# Altium PCB Transceiver.PcbDoc
Units mm, origin at the board's own origin, x right, y up, seen from the top; angles counter-clockwise.
Board outline 22 x 22.73 mm, 2 copper layers (Top Layer, Bottom Layer); 6 components, 7 nets, 20 pads, 3 vias.
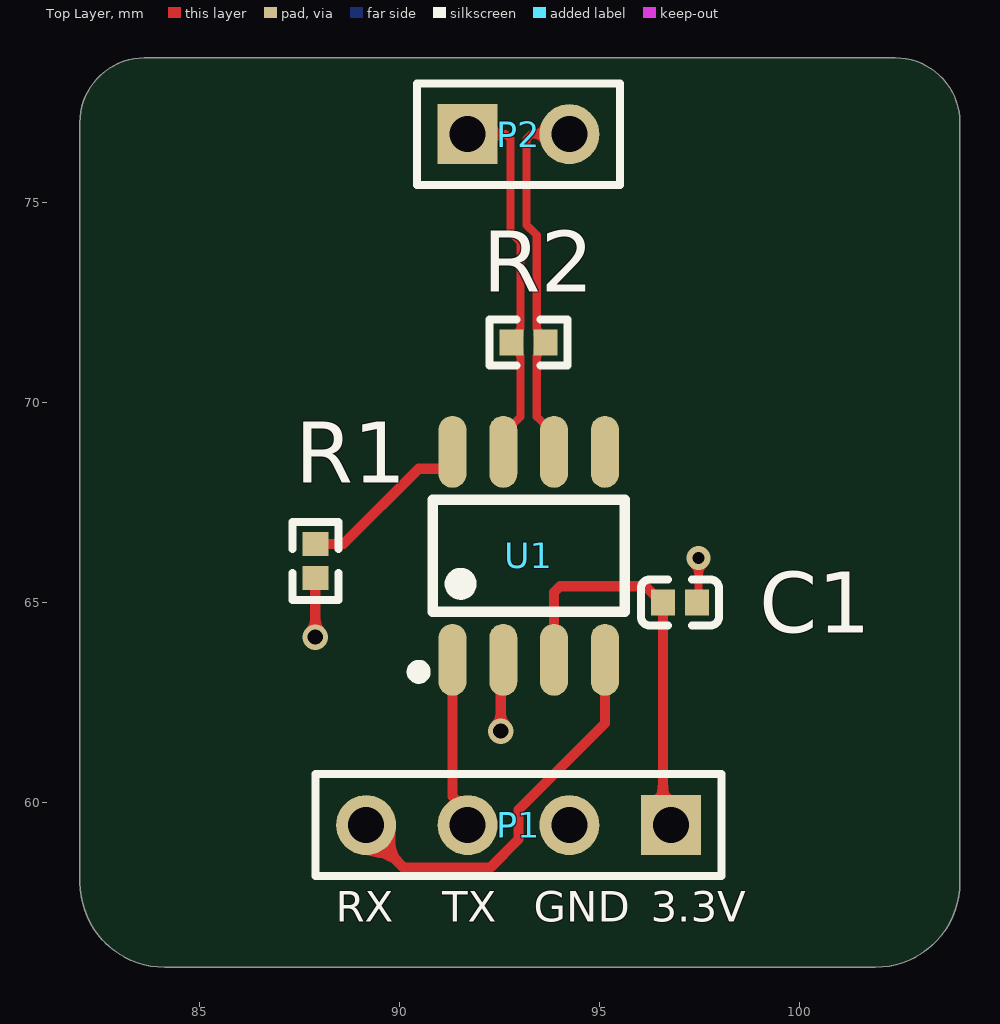
[diagram p0: Top Layer view]
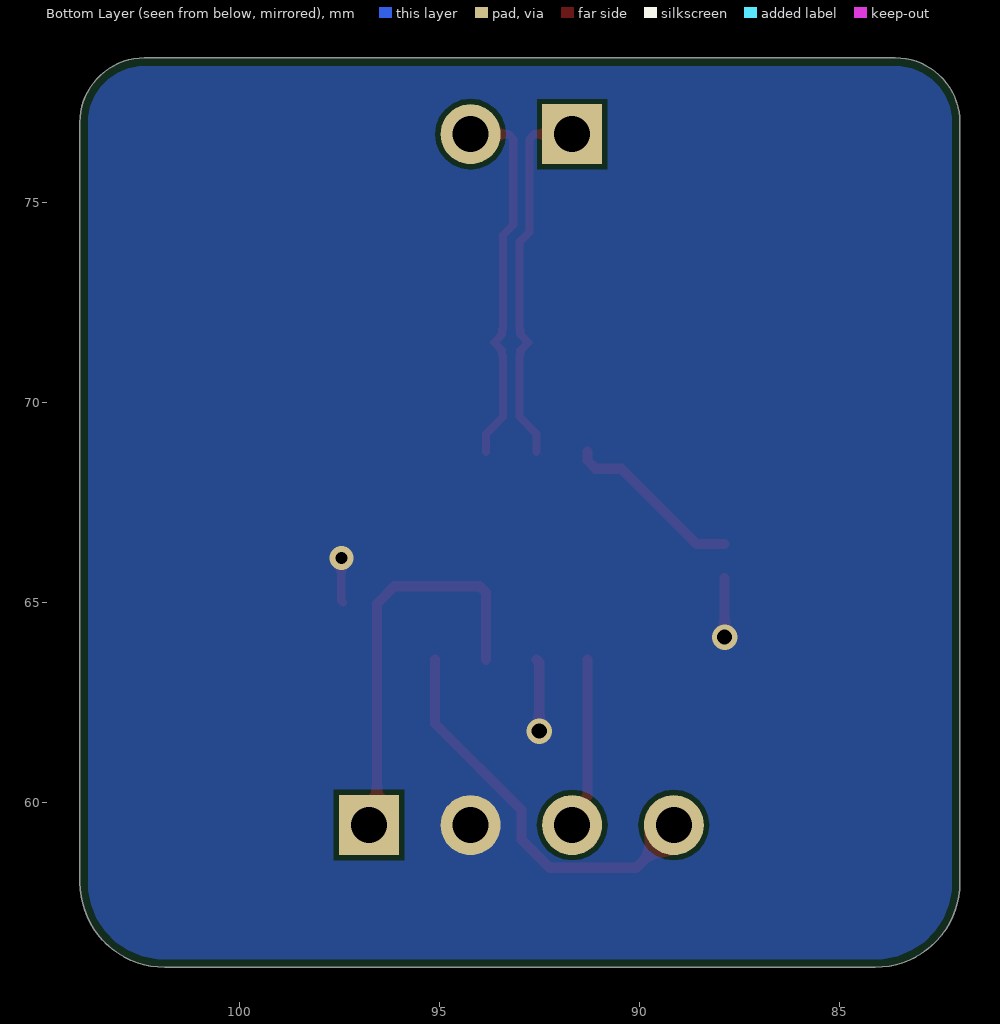
[diagram p1: Bottom Layer view, seen from below]
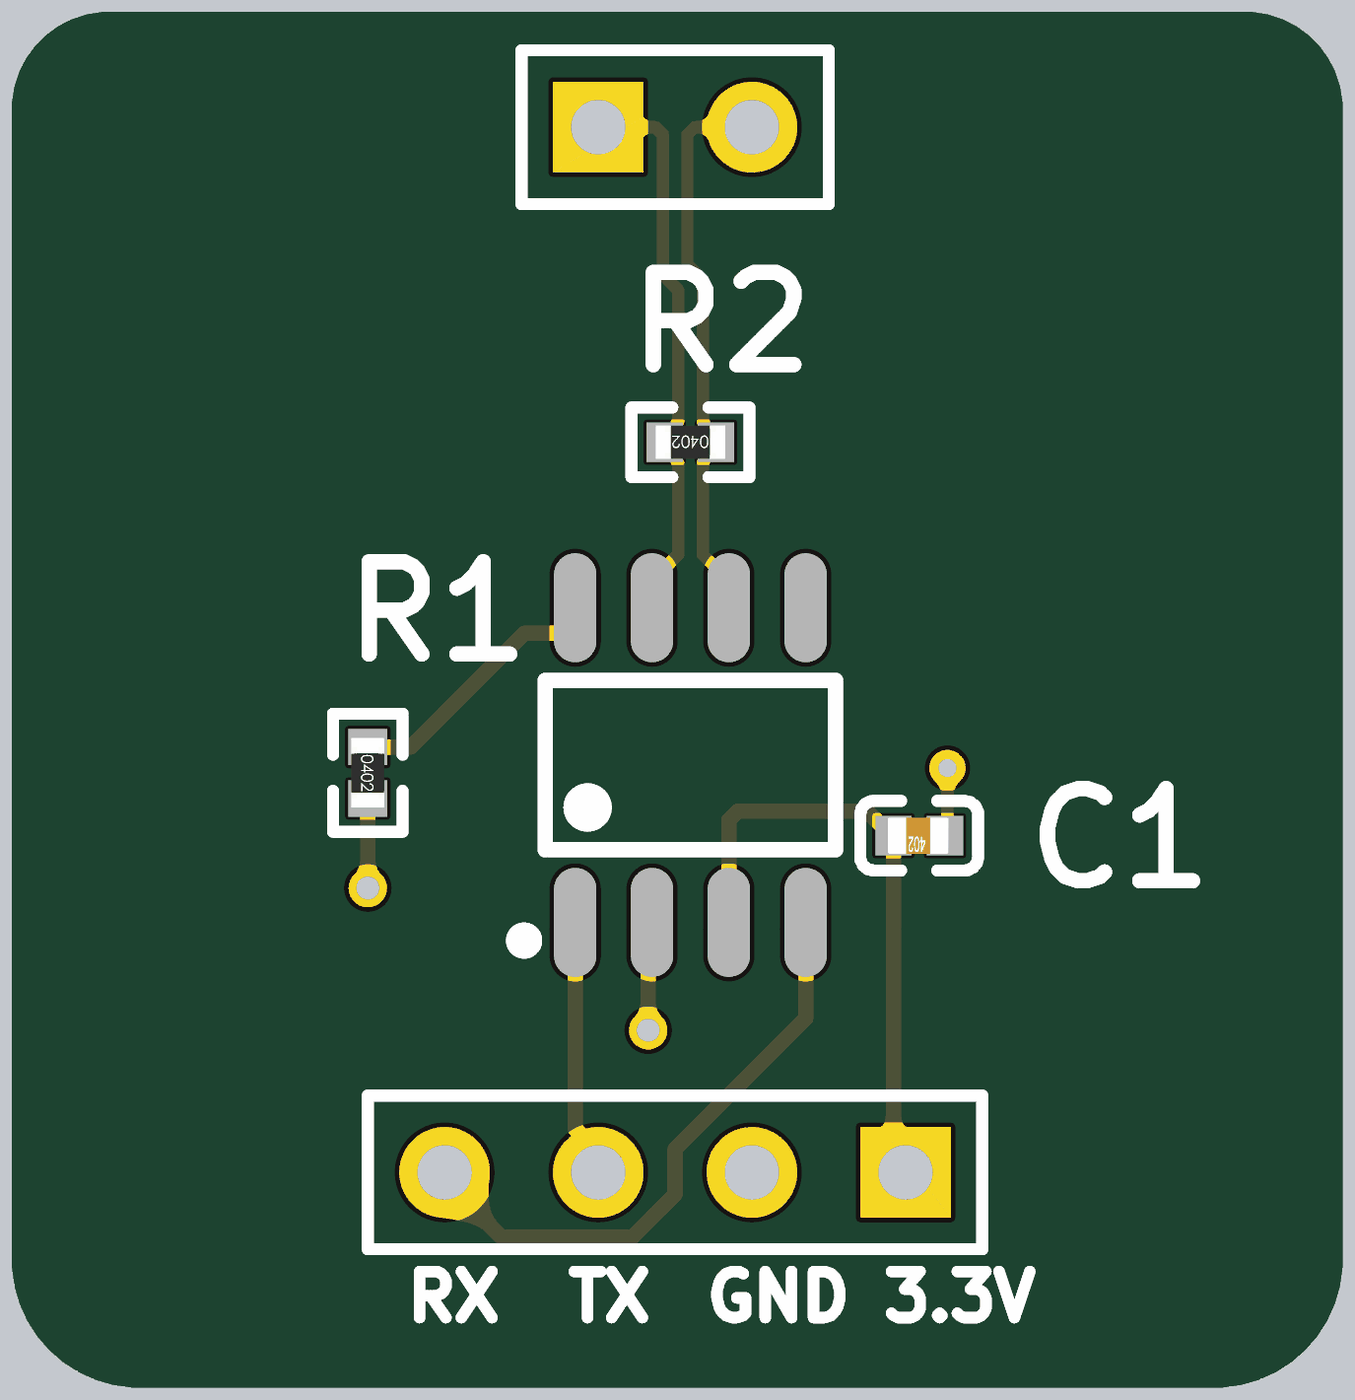
[diagram p2: 3D render of the assembled board from above, using the file's embedded part models]

## Layer stack, top to bottom
Top Solder: solder mask 0.0102, Solder Resist, Dk 3.5
Top Layer: signal copper 0.0356
Dielectric 1: dielectric 0.32, FR-4, Dk 4.8
Bottom Layer: signal copper 0.0356
Bottom Solder: solder mask 0.0102, Solder Resist, Dk 3.5

## Board outline
84.12,55.88 101.88,55.88 ccw(c101.88,58) 104,58 104,77 ccw(c102.387,77) 102.387,78.613 83.613,78.613 ccw(c83.613,77) 82,77 82,58 ccw(c84.12,58)

## Design rules (kind name [scope] priority, off if disabled: settings)
BoardOutlineClearance [All] p1: gap=0.2 ignorepadtopadclearanceinfootprint=FALSE
Clearance [All] p1: gap=0.127 ignorepadtopadclearanceinfootprint=FALSE except(0.25: Arc-Hole Track-Hole SMDPad-Hole THPad-Hole Via-Hole Fill-Hole Poly-Hole Region-Hole Text-Hole)
ComponentClearance [All] p1: gap=0.127 collisioncheckmode=3 verticalgap=0.127 showdistances=TRUE
DiffPairsRouting [All] p1: maxlimit=0.254 minlimit=0.127 mostfreqgap=0.203 toplayer_minwidth=0.127 toplayer_maxwidth=25.4 toplayer_prefwidth=0.127 bottomlayer_minwidth=0.127 bottomlayer_maxwidth=25.4 bottomlayer_prefwidth=0.127 maxuncoupledlength=12.7
Height [All] p1: minheight=0 maxheight=1816.048 prefheight=12.7
HoleSize [All] p1: absolutevalues=TRUE maxlimit=6.3 minlimit=0.3 maxpercent=80.000 minpercent=20.000
HoleToHoleClearance [All] p1: gap=0.25 allowstackedmicrovias=FALSE
MinimumAnnularRing [All] p1: minimumring=0.076
MinimumSolderMaskSliver [All] p1: minsoldermaskwidth=0
PlaneClearance [All] p1: clearance=0.127
PlaneConnect PlaneConnectPowerPads [InPadClass('PowerPads')] p1: planeconnectstyle=Direct reliefexpansion=0.508 reliefentries=4 reliefconductorwidth=0.254 reliefairgap=0.254
PlaneConnect [All] p2: pad.planeconnectstyle=Relief pad.reliefexpansion=0.3 pad.reliefentries=4 pad.reliefconductorwidth=0.127 pad.reliefairgap=0.127 via.planeconnectstyle=Direct via.reliefexpansion=0.3 via.reliefentries=4 via.reliefconductorwidth=0.127 via.reliefairgap=0.127
PolygonConnect [All] p1: thpad.connectstyle=Direct thpad.reliefconductorwidth=0.127 thpad.reliefentries=4 thpad.polygonreliefangle="90 Angle" thpad.airgapwidth=0.127 smdpad.connectstyle=Relief smdpad.reliefconductorwidth=0.127 smdpad.reliefentries=4 smdpad.polygonreliefangle="90 Angle" smdpad.airgapwidth=0.127 via.connectstyle=Direct via.reliefconductorwidth=0.127 via.reliefentries=4 via.polygonreliefangle="90 Angle" via.airgapwidth=0.127
RoutingVias [All] p1: holewidth=0.3 width=0.6 viastyle="Through Hole" minholewidth=0.3 minwidth=0.6 maxholewidth=0.6 maxwidth=6.6
SilkToSilkClearance [All] p1: silktosilkclearance=0
SilkToSolderMaskClearance [IsPad] p1: minsilkscreentomaskgap=0.127 clearancetoexposedcopper=TRUE
SolderMaskExpansion [All] p1: expansion=0.075 istentingtop=FALSE
Width [All] p1: maxlimit=25.4 minlimit=0.127 preferedwidth=0.127 minimp=50.000000 maximp=50.000000 favimp=50.000000
20 further rules are at their usual default settings.

## Classes and differential pairs
differential pair CAN: +CAN_P -CAN_N

## Components (designator, comment, footprint, x,y, rotation, side; value= is the part's Value field where it differs from the comment)
C1 "100nF" 0402_C 97,65 r180 top
P1 "Header 4" HDR1X4 96.774,59.436 r180 top
P2 "Header 2" HDR1X2 91.694,76.708 r0 top
R1 "10KΩ ±1%" 0402_R 87.884,66.04 r270 top
R2 "120Ω ±1%" 0402_R 93.218,71.501 r180 top
U1 "CAN/SN65HVD230DR" SOIC-8_150mil 93.218,66.167 r0 top

## Footprints (in the part's own frame and the unit in brackets; to place one, negate y for a bottom-side part, rotate by r counter-clockwise, add the part's x,y. Pads: shape width x height; smd on the part's side, far side on the other; paste and mask are expansions set on the pad)
0402_C [mm]
  rect 0.6x0.65 smd mask+0.051: 1(-0.425,0) 2(0.425,0)
  silkscreen extent -0.97,-0.58 0.97,0.58, body extent -0.48,-0.3 0.52,0.3, height 0.2
0402_R [mm]
  rect 0.6x0.65 smd mask+0.051: 1(-0.425,0) 2(0.425,0)
  silkscreen extent -0.97,-0.58 0.97,0.58, body extent -0.57,-0.27 0.58,0.28, height 0.41
HDR1X2 [mm] "Connector; Header; 2 Position"
  rect 1.5x1.5 hole 0.9: 1(0,0)
  round 1.5 hole 0.9: 2(2.54,0)
  silkscreen extent -1.27,-1.27 3.81,1.27
HDR1X4 [mm] "Connector; Header; 4 Position"
  rect 1.5x1.5 hole 0.9: 1(0,0)
  round 1.5 hole 0.9: 2(2.54,0) 3(5.08,0) 4(7.62,0)
  silkscreen extent -1.27,-1.27 8.89,1.27
SOIC-8_150mil [mm]
  oval 0.7x1.8 smd: 1(-1.905,-2.6) 2(-0.635,-2.6) 3(0.635,-2.6) 4(1.905,-2.6) 5(1.905,2.6) 6(0.635,2.6) 7(-0.635,2.6) 8(-1.905,2.6)
  silkscreen extent -2.9,-3.05 2.4,1.4

## Part data
C1: library part "0402 100nF (104) 10% 16V", "Chip capacitors", Manufacturer="Samsung Electro-Mechanics", Package=0402, PartNumber=CL05B104KO5NNNC, SuppliersPartNumber=C1525, Tolerance=10%, Voltage=16V, Capacitance=100nF, ComponentLink1Description="Supplier link", ComponentLink1URL=http://www.szlcsc.com/product/details_1877.html, Supplier=LC
P1: "Header, 4-Pin", LatestRevisionDate=17-Jul-2002, LatestRevisionNote="Re-released for DXP Platform.", Publisher="Altium Limited"
P2: "Header, 2-Pin", LatestRevisionDate=17-Jul-2002, LatestRevisionNote="Re-released for DXP Platform.", Publisher="Altium Limited"
R1: library part "0402 10K (1002) 1%", "Chip resistor", Manufacturer="Uniroyal Elec", Package=0402, PartNumber=0402WGF1002TCE, Power=1/16W, Resistance=10KΩ, SuppliersPartNumber=C25744, Tolerance=1%, ComponentLink1Description="Supplier link", ComponentLink1URL=http://www.szlcsc.com/product/details_26487.html, Supplier=LC
R2: library part "0402 120R (1200) 1%", "Chip resistor", Manufacturer="Uniroyal Elec", Package=0402, PartNumber=0402WGF1200TCE, Power=1/16W, Resistance=120Ω, SuppliersPartNumber=C25079, Tolerance=1%, ComponentLink1Description="Supplier link", ComponentLink1URL=http://www.szlcsc.com/product/details_25822.html, Supplier=LC
U1: library part CAN/SN65HVD230DR_[C12084], "CAN", Package=SOIC-8_150mil, SuppliersPartNumber=C12084, ComponentLink1Description=供应商链接, ComponentLink1URL=http://www.szlcsc.com/product/details_12661.html, Supplier=LC

## Via types
v1: diameter 0.635, hole 0.381, Top Layer to Bottom Layer, 2 vias
v2: diameter 0.6, hole 0.3, Top Layer to Bottom Layer, 1 vias

## Nets (pads, with @x,y where several pads share a name; then routed paths per layer and width w, separated by ;. In a path a pad name is that pad's centre, name@x,y a point inside that pad or via, vN(x,y) a via of type N, cw(c..) or ccw(c..) an arc to the next point about the centre after c; other vN are vias at no path point)
CAN_N: P2.2 R2.1 U1.6 | length 9.4
  Top Layer w0.203: U1.6 93.853,69.211 93.421,69.643 93.421,71.159 93.445,71.182 93.445,71.303 R2.1 93.445,71.699 93.445,71.82 93.421,71.843 93.421,74.181 93.167,74.435 93.167,76.589 93.286,76.708 P2.2
CAN_P: P2.1 R2.2 U1.7 | length 9.4
  Top Layer w0.203: P2.1 92.642,76.708 92.761,76.589 92.761,74.266 93.015,74.012 93.015,71.843 92.991,71.82 92.991,71.699 R2.2 92.991,71.303 92.991,71.182 93.015,71.159 93.015,69.643 92.583,69.211 U1.7
GND: C1.1 P1.2 R1.2 U1.2 | length 4.4
  Top Layer w0.203: C1.1 97.467,65.042 v2(97.467,66.117)
  Top Layer w0.254: v1(87.884,64.135) R1.2 ; v1(92.519,61.785) 92.519,63.504 U1.2
NetR1_1: R1.1 U1.8 | length 4.5
  Top Layer w0.254: R1.1 88.59,66.465 90.469,68.344 91.107,68.344 91.313,68.55 U1.8
RX: P1.4 U1.4 | length 10
  Top Layer w0.127: P1.4@89.154,59.309 P1.4
  Top Layer w0.254: P1.4@89.154,59.309 90.096,58.367 92.255,58.367 92.964,59.077 92.964,59.817 95.123,61.976 U1.4
TX: P1.3 U1.1 | length 4.3
  Top Layer w0.254: U1.1 91.313,60.154 91.694,59.773 P1.3
VCC3V3: C1.2 P1.1 U1.3 | length 10.3
  Top Layer w0.254: U1.3 93.853,65.256 94.002,65.405 96.139,65.405 C1.2@96.559,64.985 ; C1.2@96.575,64.975 96.575,59.635 P1.1
pads on no net: U1.5

## Polygon pours and split planes (outlines as drawn)
GND on Bottom Layer "Bottom Layer-GND" (solid, remove dead copper, pour order 0): 105,78.994 105,55.372 80.5,55.372 80.5,78.994

## Silkscreen, mask and mechanical layers (free items; w line width, h text height)
Top Overlay:
  text "RX" at 88.392,57.023 h0.76
  text "TX" at 91.059,57.023 h0.76
  text "GND" at 93.345,57.023 h0.76
  text "3.3V" at 96.266,57.023 h0.76
Mechanical 1:
  the board outline again, w0.254